# Altium PCB [1]BMS_AFE.PcbDoc (part 2 of 3)
Units mm, origin at the board's own origin, x right, y up, seen from the top; angles counter-clockwise.
Board outline 110 x 135 mm, 4 copper layers (Top Layer, Layer 1, Layer 2, Bottom Layer), stack 2.022 mm thick; 197 components, 113 nets, 551 pads, 368 vias.
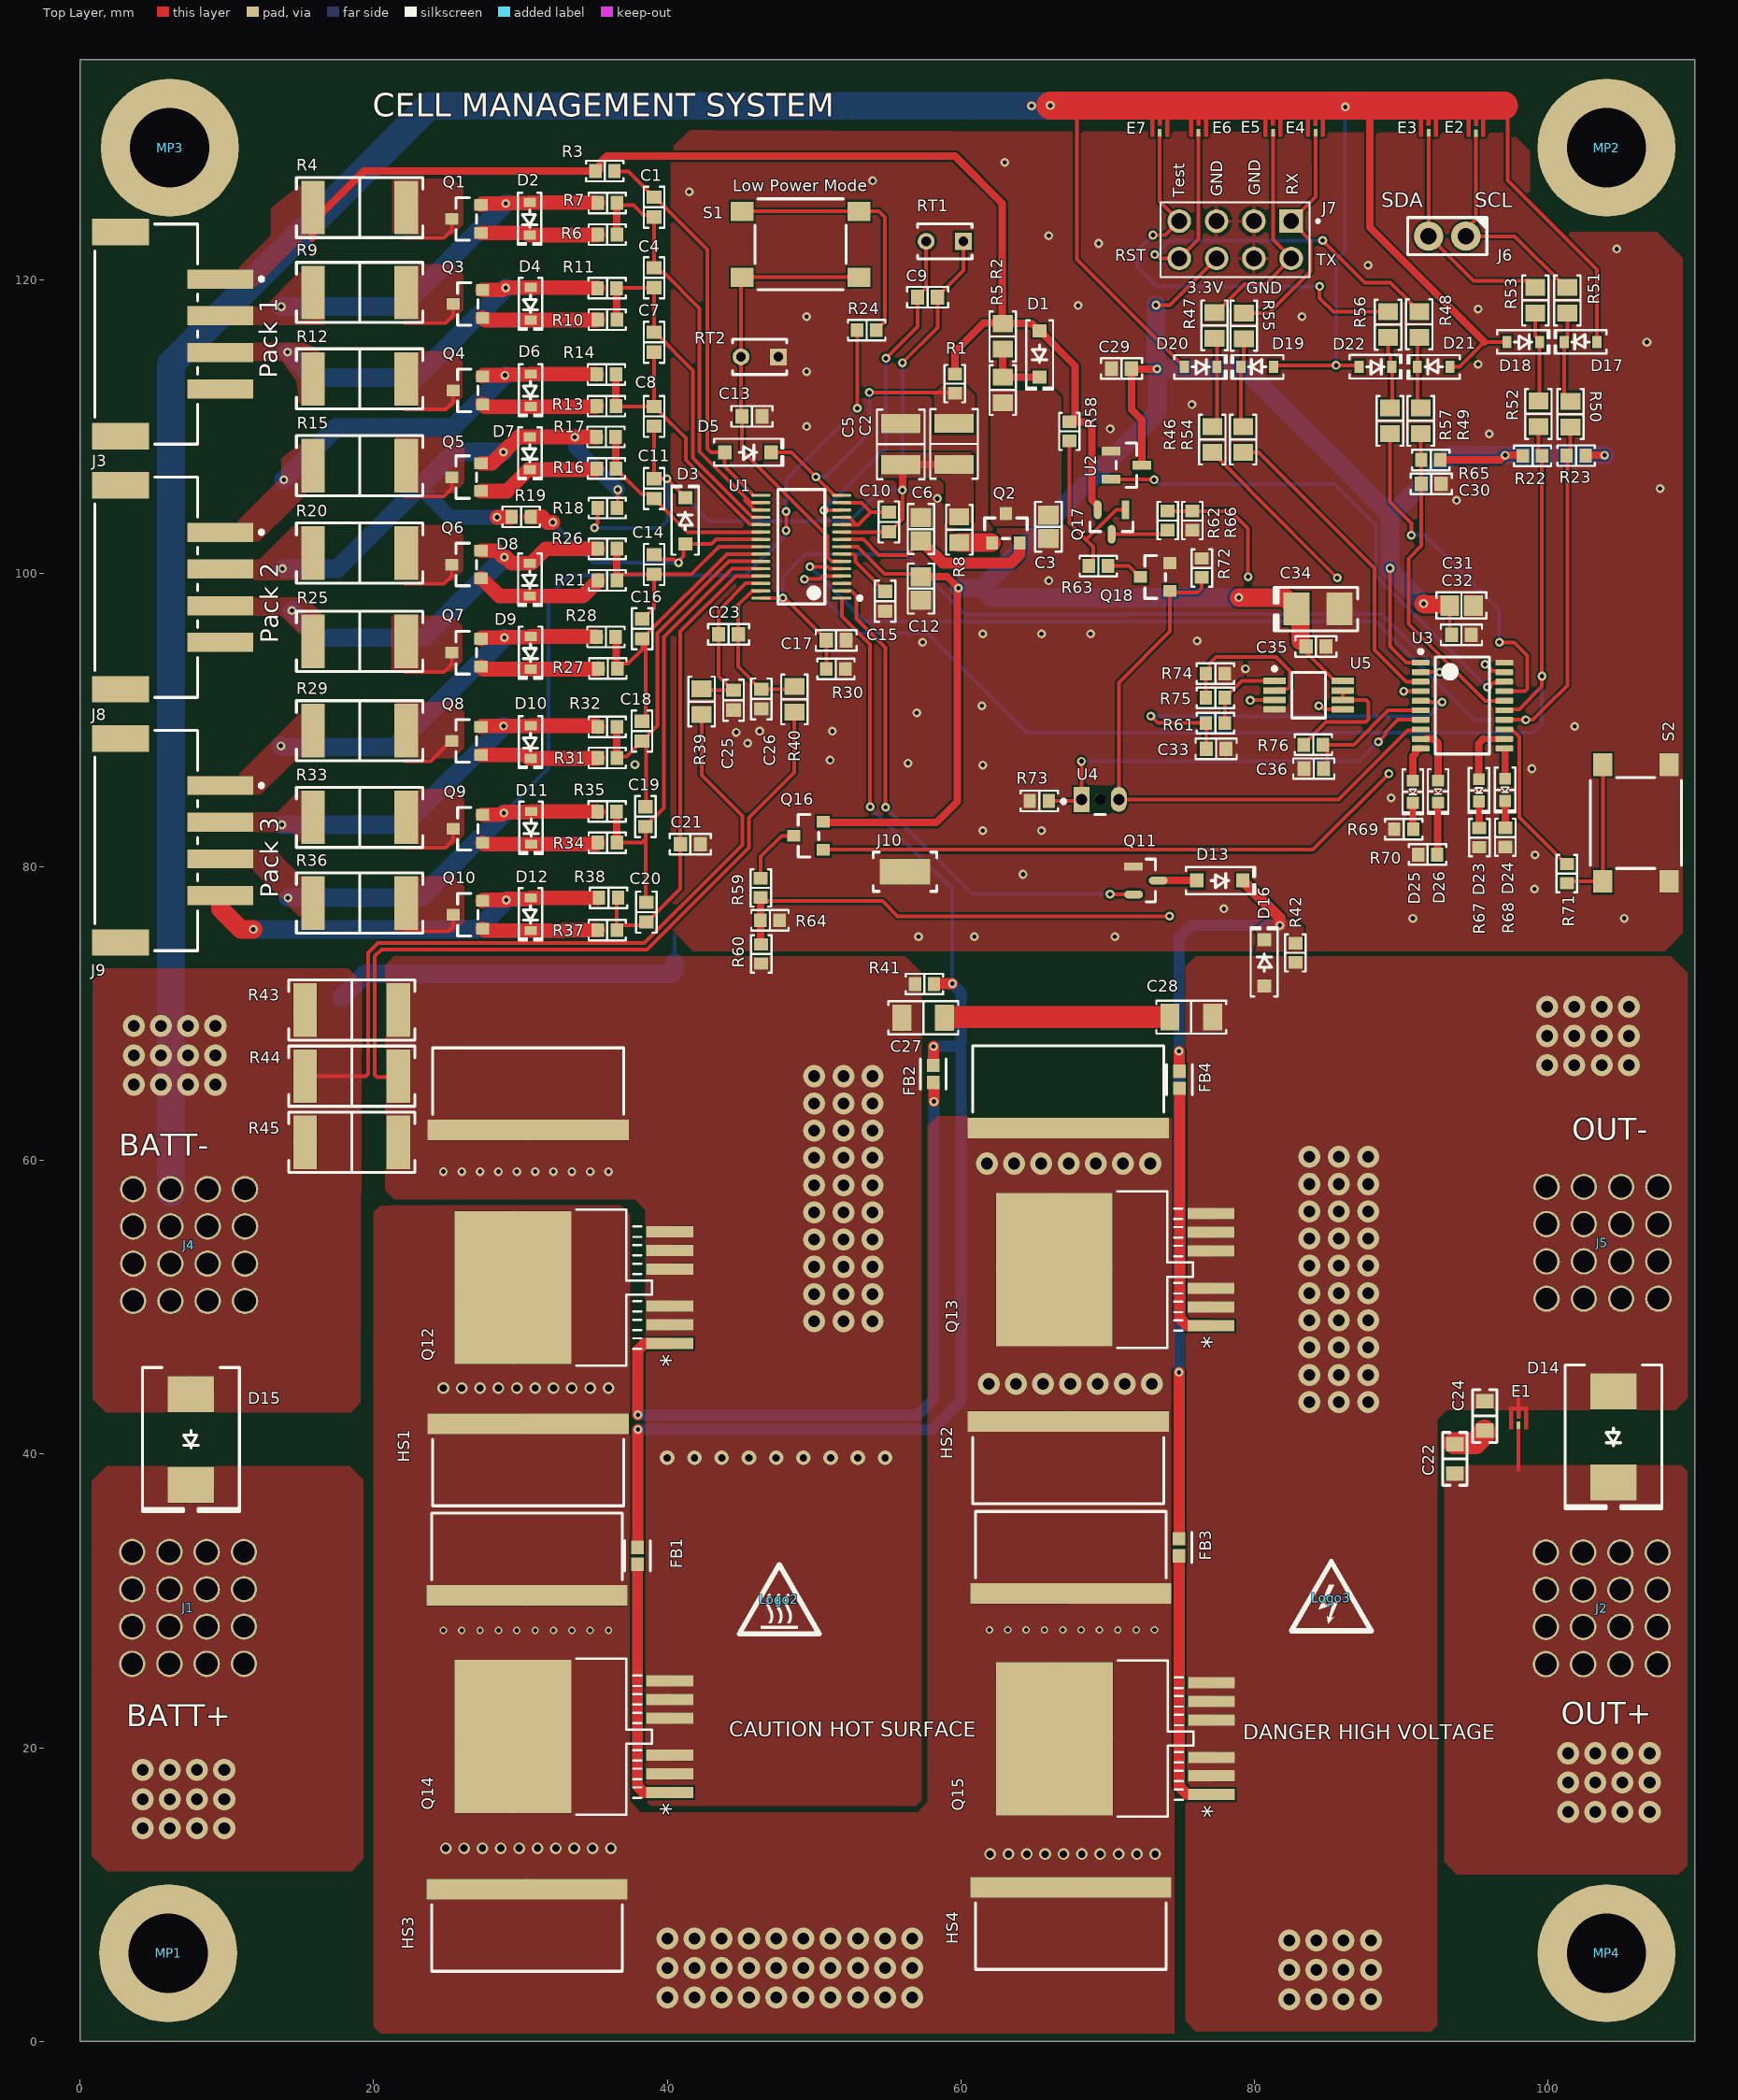
[diagram p0: Top Layer view]

## Part data (continued)
Q1 Q3 Q4 Q5 Q6 Q7 Q8 Q9 Q10: "MOSFET N-CH 12V 9.3A SC59", Current - Continuous Drain (Id) @ 25°C="9.3A (Ta)", Drain to Source Voltage (Vdss)="12 V", Drive Voltage (Max Rds On,  Min Rds On)="1.2V, 2.5V", Input Capacitance (Ciss) (Max) @ Vds="2426 pF @ 10 V", manufacturer="Diodes Incorporated", Operating Temperature="-55°C ~ 150°C (TJ)", Package / Case="TO-236-3, SC-59, SOT-23-3", Power Dissipation (Max)="680mW (Ta)", Supplier Device Package=SC-59-3, Supplier Part Number 1=DMN1019USN-7DICT-ND, componentlink1description=Datasheet, componentlink1url=https://www.diodes.com/assets/Datasheets/DMN1019USN.pdf, componentlink2description="DigiKey Link", componentlink2url=https://www.digikey.com/en/products/detail/diodes-incorporated/DMN1019USN-7/4898853, FET Type=N-Channel, Gate Charge (Qg) (Max) @ Vgs="50.6 nC @ 8 V", lastupdated="6/3/2024 8:15:16 PM", Lifecycle Status=Active, Minimum Order=1, Mounting Type="Surface Mount", packaging=TapeAndReel, Part Number=DMN1019USN-7, Part Status=Active, price=0.10, Rds On (Max) @ Id, Vgs="10mOhm @ 9.7A, 4.5V", series=-, Supplier 1=DigiKey, Technology="MOSFET (Metal Oxide)", Vgs (Max)=±8V, Vgs(th) (Max) @ Id="800mV @ 250µA"
Q2 Q18: "MOSFET N-CH 60V 260MA SOT-23", Current - Continuous Drain (Id) @ 25°C="260mA (Ta)", Drain to Source Voltage (Vdss)=60V, Drive Voltage (Max Rds On,  Min Rds On)="4.5V, 10V", Input Capacitance (Ciss) (Max) @ Vds="26.7pF @ 25V", manufacturer="ON Semiconductor", Operating Temperature="-55°C ~ 150°C (TJ)", Package / Case="TO-236-3, SC-59, SOT-23-3", Power Dissipation (Max)="300mW (Tj)", Supplier Device Package="SOT-23-3 (TO-236)", Supplier Part Number 1=2N7002ET1GOSCT-ND, componentlink1description=Datasheet, componentlink1url=http://www.onsemi.com/pub/Collateral/2N7002E-D.PDF, componentlink2description="DigiKey Link", componentlink2url=http://digikey.com/product-detail/en/on-semiconductor/2N7002ET1G/2N7002ET1GOSCT-ND/1967029, FET Type=N-Channel, Gate Charge (Qg) (Max) @ Vgs="0.81nC @ 5V", lastupdated="6/3/2024 8:15:26 PM", Lifecycle Status=Active, Minimum Order=1, Mounting Type="Surface Mount", packaging=TapeAndReel, Part Number=2N7002ET1G, Part Status=Active, price=0.03, Rds On (Max) @ Id, Vgs="2.5Ohm @ 240mA, 10V", series=-, Supplier 1=DigiKey, Technology="MOSFET (Metal Oxide)", Vgs (Max)=±20V, Vgs(th) (Max) @ Id="2.5V @ 250µA"
Q11 Q17: "MOSFET P-CH 60V 185MA SOT23-3", Case/Package=SOT-23-3, Continuous Drain Current (ID)=-185mA, Drain to Source Breakdown Voltage=-60V, Drain to Source Resistance=10R, Gate to Source Voltage (Vgs)=20V, Input Capacitance=155pF, Max Operating Temperature=150°C, Max Power Dissipation=350mW, Min Operating Temperature=-55°C, Package Quantity=1, Supplier Part Number 1=781-TP0610K-T1-GE3, Threshold Voltage=-2V, Drain to Source Voltage (Vdss)=-60V, Element Configuration=Single, Height=1.02mm, Lead Free="Lead Free", Length=3.04mm, Mount="Surface Mount", Nominal Vgs=-1V, Number of Channels=1, Number of Elements=1, Number of Pins=3, packaging="Tape and Reel", Polarity=P-CHANNEL, Power Dissipation=350mW, Radiation Hardening=No, Rds On Max=190mR, RoHS Compliant=Yes, series=TrenchFET®, Supplier 1=Mouser, Turn-Off Delay Time=35ns, Turn-On Delay Time=20ns, Weight=0.050717oz, Width=1.4mm
Q12 Q13 Q14 Q15: "No Description Available", Mfr_Name=STMicroelectronics, Supplier Part Number 1=511-STH315N10F7-6, RefDes=RefDes, Supplier 1=Mouser, Type=Type
Q16: "MOSFET P-CH 12V 2.6A SSOT3", Current - Continuous Drain (Id) @ 25°C="2.6A (Ta)", Drain to Source Voltage (Vdss)=12V, Drive Voltage (Max Rds On,  Min Rds On)="1.8V, 4.5V", Input Capacitance (Ciss) (Max) @ Vds="1138pF @ 6V", manufacturer="ON Semiconductor", Operating Temperature="-55°C ~ 150°C (TJ)", Package / Case="TO-236-3, SC-59, SOT-23-3", Power Dissipation (Max)="500mW (Ta)", Supplier Device Package=SuperSOT-3, Supplier Part Number 1=FDN306PCT-ND, componentlink1description=Datasheet, componentlink1url=https://www.onsemi.com/pub/Collateral/FDN306P-D.pdf, componentlink2description="DigiKey Link", componentlink2url=http://digikey.com/product-detail/en/on-semiconductor/FDN306P/FDN306PCT-ND/965600, FET Type=P-Channel, Gate Charge (Qg) (Max) @ Vgs="17nC @ 4.5V", lastupdated="6/3/2024 8:15:27 PM", Lifecycle Status=Active, Minimum Order=1, Mounting Type="Surface Mount", packaging=TapeAndReel, Part Number=FDN306P, Part Status=Active, price=0.13, Rds On (Max) @ Id, Vgs="40mOhm @ 2.6A, 4.5V", series=PowerTrench®, Supplier 1=DigiKey, Technology="MOSFET (Metal Oxide)", Vgs (Max)=±8V, Vgs(th) (Max) @ Id="1.5V @ 250µA"
R1 R3 R7 R11 R14 R17 R18 R19 R26 R28 R32 R35 R38 R67: library part CRCW06031K00FKEAC, "RES 1K OHM 1% 1/10W 0603", Device Package="0603 (1608 Metric)", manufacturer="Vishay Dale", Operating Temperature="-55°C ~ 155°C", Power (Watts)="0.1W, 1/10W", Supplier Device Package=0603, Supplier Part Number 1=541-3949-1-ND, Temperature Coefficient=±100ppm/°C, Tolerance=±1%, componentlink1description=Datasheet, componentlink1url=http://www.vishay.com/docs/28773/crcwce3.pdf, componentlink2description="DigiKey Link", componentlink2url=https://www.digikey.com/en/products/detail/vishay-dale/CRCW06031K00FKEAC/7928371, Composition="Thick Film", Height - Seated (Max)="0.022\" (0.55mm)", lastupdated="2/9/2024 8:43:06 PM", Lifecycle Status=Active, Minimum Order=1, Number of Terminations=2, Package / Case="0603 (1608 Metric)", packaging=CutTape, Part Number=CRCW06031K00FKEAC, Part Status=Active, partid=12551, price=0.01, Resistance="1 kOhms", series=CRCW-C, Supplier 1=DigiKey
R2 R8: library part CRCW0805100KFKEAC, "RES 100K OHM 1% 1/8W 0805", Device Package="0805 (2012 Metric)", manufacturer="Vishay Dale", Operating Temperature="-55°C ~ 155°C", Power (Watts)="0.125W, 1/8W", Supplier Device Package=0805, Supplier Part Number 1=541-3978-6-ND, Temperature Coefficient=±100ppm/°C, Tolerance=±1%, componentlink1description=Datasheet, componentlink1url=http://www.vishay.com/docs/28773/crcwce3.pdf, componentlink2description="DigiKey Link", componentlink2url=https://www.digikey.com/en/products/detail/vishay-dale/CRCW0805100KFKEAC/7928400, Composition="Thick Film", Height - Seated (Max)="0.024\" (0.60mm)", lastupdated="2/8/2024 9:01:19 PM", Lifecycle Status=Active, Minimum Order=1, Number of Terminations=2, Package / Case="0805 (2012 Metric)", packaging=ReReel, Part Number=CRCW0805100KFKEAC, Part Status=Active, partid=46227, price=0.01, Resistance="100 kOhms", series=CRCW-C, Size / Dimension="0.079\" L x 0.049\" W (2.00mm x 1.25mm)", Supplier 1=DigiKey
R4 R9 R12 R15 R20 R25 R29 R33 R36: library part CRCW251228R7FKEG, "RES SMD 28.7 OHM 1% 1W 2512", Device Package="2512 (6432 Metric)", manufacturer="Vishay Dale", Operating Temperature="-55°C ~ 155°C", Power (Watts)=1W, Ratings=AEC-Q200, Supplier Device Package=2512, Supplier Part Number 1=541-28.7AFCT-ND, Temperature Coefficient=±100ppm/°C, Tolerance=±1%, componentlink1description=Datasheet, componentlink1url=http://www.vishay.com/docs/20035/dcrcwe3.pdf, componentlink2description="DigiKey Link", componentlink2url=http://digikey.com/product-detail/en/vishay-dale/CRCW251228R7FKEG/541-28.7AFCT-ND/1178678, Composition="Thick Film", Features="Automotive AEC-Q200", Height - Seated (Max)="0.028\" (0.70mm)", lastupdated="9/2/2020 1:26:59 AM", Lifecycle Status=Active, Minimum Order=1, Number of Terminations=2, Package / Case="2512 (6432 Metric)", packaging=TapeAndReel, Part Number=CRCW251228R7FKEG, Part Status=Active, price=0.04, Resistance="28.7 Ohms", series=CRCW, Size / Dimension="0.248\" L x 0.124\" W (6.30mm x 3.15mm)", Supplier 1=DigiKey
R5 R39 R40 R46 R47 R48 R49 R50 R51 R52 R53 R54 R55 R56 R57: library part CRCW0805100RFKEA, "RES SMD 100 OHM 1% 1/8W 0805", Device Package="0805 (2012 Metric)", manufacturer="Vishay Dale", Operating Temperature="-55°C ~ 155°C", Power (Watts)="0.125W, 1/8W", Ratings=AEC-Q200, Supplier Device Package=0805, Supplier Part Number 1=541-100CCT-ND, Temperature Coefficient=±100ppm/°C, Tolerance=±1%, componentlink1description=Datasheet, componentlink1url=http://www.vishay.com/docs/20035/dcrcwe3.pdf, componentlink2description="DigiKey Link", componentlink2url=https://www.digikey.com/en/products/detail/vishay-dale/CRCW0805100RFKEA/1175523, Composition="Thick Film", Features="Automotive AEC-Q200", Height - Seated (Max)="0.020\" (0.50mm)", lastupdated="2/8/2024 9:02:37 PM", Lifecycle Status=Active, Minimum Order=1, Number of Terminations=2, Package / Case="0805 (2012 Metric)", packaging=TapeAndReel, Part Number=CRCW0805100RFKEA, Part Status=Active, partid=28106, price=0.01, Resistance="100 Ohms", series=CRCW, Size / Dimension="0.079\" L x 0.049\" W (2.00mm x 1.25mm)", Supplier 1=DigiKey
R6 R10 R13 R16 R21 R22 R23 R27 R31 R34 R37: library part CRCW060310K0JNEA, "RES SMD 10K OHM 5% 1/10W 0603", Device Package="0603 (1608 Metric)", manufacturer="Vishay Dale", Operating Temperature="-55°C ~ 155°C", Power (Watts)="0.1W, 1/10W", Ratings=AEC-Q200, Supplier Device Package=0603, Supplier Part Number 1=541-10KGCT-ND, Temperature Coefficient=±200ppm/°C, Tolerance=±5%, componentlink1description=Datasheet, componentlink1url=http://www.vishay.com/docs/20035/dcrcwe3.pdf, componentlink2description="DigiKey Link", componentlink2url=https://www.digikey.com/en/products/detail/vishay-dale/CRCW060310K0JNEA/1174253, Composition="Thick Film", Features="Automotive AEC-Q200", Height - Seated (Max)="0.020\" (0.50mm)", lastupdated="2/9/2024 8:43:35 PM", Lifecycle Status=Active, Minimum Order=1, Number of Terminations=2, Package / Case="0603 (1608 Metric)", packaging=CutTape, Part Number=CRCW060310K0JNEA, Part Status=Active, partid=5216, price=0.01, Resistance="10 kOhms", series=CRCW, Size / Dimension="0.063\" L x 0.033\" W (1.60mm x 0.85mm)", Supplier 1=DigiKey
R24 R71: library part CRCW06033K00JNEA, "RES SMD 3K OHM 5% 1/10W 0603", Device Package="0603 (1608 Metric)", manufacturer="Vishay Dale", Operating Temperature="-55°C ~ 155°C", Power (Watts)="0.1W, 1/10W", Ratings=AEC-Q200, Supplier Device Package=0603, Supplier Part Number 1=541-3.0KGCT-ND, Temperature Coefficient=±200ppm/°C, Tolerance=±5%, componentlink1description=Datasheet, componentlink1url=http://www.vishay.com/docs/20035/dcrcwe3.pdf, componentlink2description="DigiKey Link", componentlink2url=https://www.digikey.com/en/products/detail/vishay-dale/CRCW06033K00JNEA/1174240, Composition="Thick Film", Features="Automotive AEC-Q200", Height - Seated (Max)="0.020\" (0.50mm)", lastupdated="2/9/2024 8:42:33 PM", Lifecycle Status=Active, Minimum Order=1, Number of Terminations=2, Package / Case="0603 (1608 Metric)", packaging=TapeAndReel, Part Number=CRCW06033K00JNEA, Part Status=Active, partid=21261, price=0.01, Resistance="3 kOhms", series=CRCW, Size / Dimension="0.063\" L x 0.033\" W (1.60mm x 0.85mm)", Supplier 1=DigiKey
R30: library part CRCW0603499KFKEAHP, "RES SMD 499K OHM 1% 1/3W 0603", Device Package="0603 (1608 Metric)", manufacturer="Vishay Dale", Operating Temperature="-55°C ~ 155°C", Power (Watts)="0.333W, 1/3W", Ratings=AEC-Q200, Supplier Device Package=0603, Supplier Part Number 1=541-499KSCT-ND, Temperature Coefficient=±100ppm/°C, Tolerance=±1%, componentlink1description=Datasheet, componentlink1url=http://www.vishay.com/docs/20043/crcwhpe3.pdf, componentlink2description="DigiKey Link", componentlink2url=https://www.digikey.com/en/products/detail/vishay-dale/CRCW0603499KFKEAHP/2226474, Composition="Thick Film", Features="Automotive AEC-Q200, Pulse Withstanding", Height - Seated (Max)="0.022\" (0.55mm)", lastupdated="2/9/2024 8:42:58 PM", Lifecycle Status=Active, Minimum Order=1, Number of Terminations=2, Package / Case="0603 (1608 Metric)", packaging=TapeAndReel, Part Number=CRCW0603499KFKEAHP, Part Status=Active, partid=14787, price=0.02, Resistance="499 kOhms", series=CRCW-HP, Size / Dimension="0.063\" L x 0.033\" W (1.60mm x 0.85mm)", Supplier 1=DigiKey
R41 R42: library part RMCF0603JT1M00, "RES 1M OHM 5% 1/10W 0603", Device Package="0603 (1608 Metric)", manufacturer="Stackpole Electronics Inc", Operating Temperature="-55°C ~ 155°C", Power (Watts)="0.1W, 1/10W", Ratings=AEC-Q200, Supplier Device Package=0603, Supplier Part Number 1=RMCF0603JT1M00CT-ND, Temperature Coefficient=±200ppm/°C, Tolerance=±5%, componentlink1description=Datasheet, componentlink1url=https://www.seielect.com/catalog/sei-rmcf_rmcp.pdf, componentlink2description="DigiKey Link", componentlink2url=https://www.digikey.com/en/products/detail/stackpole-electronics-inc/RMCF0603JT1M00/1758066, Composition="Thick Film", Features="Automotive AEC-Q200", Height - Seated (Max)="0.022\" (0.55mm)", lastupdated="2/9/2024 8:43:33 PM", Lifecycle Status=Active, Minimum Order=1, Number of Terminations=2, Package / Case="0603 (1608 Metric)", packaging=CutTape, Part Number=RMCF0603JT1M00, Part Status=Active, partid=5847, price=0.01, Resistance="1 MOhms", series=RMCF, Size / Dimension="0.061\" L x 0.031\" W (1.55mm x 0.80mm)", Supplier 1=DigiKey
R43 R44 R45: library part WSLF25121L000FEA, "RES 0.001 OHM 1% 5W 2512", Device Package="2512 (6432 Metric)", manufacturer="Vishay Dale", Operating Temperature="-65°C ~ 170°C", Power (Watts)=5W, Ratings=AEC-Q200, Supplier Device Package=2512, Supplier Part Number 1=541-3125-1-ND, Temperature Coefficient=±170ppm/°C, Tolerance=±1%, componentlink1description=Datasheet, componentlink1url=http://www.vishay.com/docs/30193/wslf.pdf, componentlink2description="DigiKey Link", componentlink2url=http://digikey.com/product-detail/en/vishay-dale/WSLF25121L000FEA/541-3125-1-ND/6194698, Composition="Metal Element", Features="Automotive AEC-Q200, Current Sense, Moisture Resistant, Pulse Withstanding", Height - Seated (Max)="0.034\" (0.86mm)", lastupdated="5/23/2022 1:49:31 PM", Lifecycle Status=Active, Minimum Order=1, Number of Terminations=2, Package / Case="2512 (6432 Metric)", packaging=TapeAndReel, Part Number=WSLF25121L000FEA, Part Status=Active, price=0.22, Resistance="1 mOhms", series=WSLF, Size / Dimension="0.250\" L x 0.119\" W (6.35mm x 3.02mm)", Supplier 1=DigiKey
R58 R72: library part CRCW0603100KJNEA, "RES SMD 100K OHM 5% 1/10W 0603", Device Package="0603 (1608 Metric)", manufacturer="Vishay Dale", Operating Temperature="-55°C ~ 155°C", Power (Watts)="0.1W, 1/10W", Ratings=AEC-Q200, Supplier Device Package=0603, Supplier Part Number 1=541-100KGCT-ND, Temperature Coefficient=±200ppm/°C, Tolerance=±5%, componentlink1description=Datasheet, componentlink1url=http://www.vishay.com/docs/20035/dcrcwe3.pdf, componentlink2description="DigiKey Link", componentlink2url=https://www.digikey.com/en/products/detail/vishay-dale/CRCW0603100KJNEA/1174277, Composition="Thick Film", Features="Automotive AEC-Q200", Height - Seated (Max)="0.020\" (0.50mm)", lastupdated="2/9/2024 8:42:33 PM", Lifecycle Status=Active, Minimum Order=1, Number of Terminations=2, Package / Case="0603 (1608 Metric)", packaging=TapeAndReel, Part Number=CRCW0603100KJNEA, Part Status=Active, partid=21189, price=0.01, Resistance="100 kOhms", series=CRCW, Size / Dimension="0.063\" L x 0.033\" W (1.60mm x 0.85mm)", Supplier 1=DigiKey
R59: library part CRCW0603154KFKEAHP, "RES SMD 154K OHM 1% 1/3W 0603", Device Package="0603 (1608 Metric)", manufacturer="Vishay Dale", Operating Temperature="-55°C ~ 155°C", Power (Watts)="0.333W, 1/3W", Ratings=AEC-Q200, Supplier Device Package=0603, Supplier Part Number 1=541-CRCW0603154KFKEAHPCT-ND, Temperature Coefficient=±100ppm/°C, Tolerance=±1%, componentlink1description=Datasheet, componentlink1url=https://www.vishay.com/docs/20043/crcwhpe3.pdf, componentlink2description="DigiKey Link", componentlink2url=https://www.digikey.com/en/products/detail/vishay-dale/CRCW0603154KFKEAHP/2226414, Composition="Thick Film", Features="Automotive AEC-Q200, Pulse Withstanding", Height - Seated (Max)="0.022\" (0.55mm)", lastupdated="2/9/2024 8:40:40 PM", Lifecycle Status=Active, Minimum Order=1, Number of Terminations=2, Package / Case="0603 (1608 Metric)", packaging=TapeAndReel, Part Number=CRCW0603154KFKEAHP, Part Status=Active, partid=78501, price=0.02, Resistance="154 kOhms", series=CRCW-HP, Size / Dimension="0.063\" L x 0.033\" W (1.60mm x 0.85mm)", Supplier 1=DigiKey
R60 R68 R69 R70: library part CRCW06031K00JNEA, "RES SMD 1K OHM 5% 1/10W 0603", Device Package="0603 (1608 Metric)", manufacturer="Vishay Dale", Operating Temperature="-55°C ~ 155°C", Power (Watts)="0.1W, 1/10W", Ratings=AEC-Q200, Supplier Device Package=0603, Supplier Part Number 1=541-1.0KGCT-ND, Temperature Coefficient=±200ppm/°C, Tolerance=±5%, componentlink1description=Datasheet, componentlink1url=http://www.vishay.com/docs/20035/dcrcwe3.pdf, componentlink2description="DigiKey Link", componentlink2url=https://www.digikey.com/en/products/detail/vishay-dale/CRCW06031K00JNEA/1174229, Composition="Thick Film", Features="Automotive AEC-Q200", Height - Seated (Max)="0.020\" (0.50mm)", lastupdated="2/9/2024 8:42:33 PM", Lifecycle Status=Active, Minimum Order=1, Number of Terminations=2, Package / Case="0603 (1608 Metric)", packaging=TapeAndReel, Part Number=CRCW06031K00JNEA, Part Status=Active, partid=21209, price=0.01, Resistance="1 kOhms", series=CRCW, Size / Dimension="0.063\" L x 0.033\" W (1.60mm x 0.85mm)", Supplier 1=DigiKey
R61 R74 R76: library part CRCW06031K30FKEAC, "RES 1.3K OHM 1% 1/10W 0603", Device Package="0603 (1608 Metric)", manufacturer="Vishay Dale", Operating Temperature="-55°C ~ 155°C", Power (Watts)="0.1W, 1/10W", Supplier Device Package=0603, Supplier Part Number 1=541-5229-1-ND, Temperature Coefficient=±100ppm/°C, Tolerance=±1%, componentlink1description=Datasheet, componentlink1url=https://www.vishay.com/docs/28773/crcwce3.pdf, componentlink2description="DigiKey Link", componentlink2url=https://www.digikey.com/en/products/detail/vishay-dale/CRCW06031K30FKEAC/7924107, Composition="Thick Film", Height - Seated (Max)="0.022\" (0.55mm)", lastupdated="2/9/2024 8:41:17 PM", Lifecycle Status=Active, Minimum Order=1, Number of Terminations=2, Package / Case="0603 (1608 Metric)", packaging=TapeAndReel, Part Number=CRCW06031K30FKEAC, Part Status=Active, partid=65830, price=0.01, Resistance="1.3 kOhms", series=CRCW-C, Size / Dimension="0.063\" L x 0.031\" W (1.60mm x 0.80mm)", Supplier 1=DigiKey
R62: library part CRCW0603110KFKEB, "RES SMD 110K OHM 1% 1/10W 0603", Device Package="0603 (1608 Metric)", manufacturer="Vishay Dale", Operating Temperature="-55°C ~ 155°C", Power (Watts)="0.1W, 1/10W", Ratings=AEC-Q200, Supplier Device Package=0603, Supplier Part Number 1=541-CRCW0603110KFKEBCT-ND, Temperature Coefficient=±100ppm/°C, Tolerance=±1%, componentlink1description=Datasheet, componentlink1url=http://www.vishay.com/docs/20035/dcrcwe3.pdf, componentlink2description="DigiKey Link", componentlink2url=https://www.digikey.com/en/products/detail/vishay-dale/CRCW0603110KFKEB/5070720, Composition="Thick Film", Features="Automotive AEC-Q200", Height - Seated (Max)="0.020\" (0.50mm)", lastupdated="2/9/2024 8:41:46 PM", Lifecycle Status=Active, Minimum Order=1, Number of Terminations=2, Package / Case="0603 (1608 Metric)", packaging=TapeAndReel, Part Number=CRCW0603110KFKEB, Part Status=Active, partid=56611, price=0.01, Resistance="110 kOhms", series=CRCW, Size / Dimension="0.063\" L x 0.033\" W (1.60mm x 0.85mm)", Supplier 1=DigiKey
R63: library part CRCW0603360KFKEAC, "RES 360K OHM 1% 1/10W 0603", Device Package="0603 (1608 Metric)", manufacturer="Vishay Dale", Operating Temperature="-55°C ~ 155°C", Power (Watts)="0.1W, 1/10W", Supplier Device Package=0603, Supplier Part Number 1=541-5366-1-ND, Temperature Coefficient=±100ppm/°C, Tolerance=±1%, componentlink1description=Datasheet, componentlink1url=https://www.vishay.com/docs/28773/crcwce3.pdf, componentlink2description="DigiKey Link", componentlink2url=https://www.digikey.com/en/products/detail/vishay-dale/CRCW0603360KFKEAC/7924506, Composition="Thick Film", Height - Seated (Max)="0.022\" (0.55mm)", lastupdated="2/9/2024 8:41:05 PM", Lifecycle Status=Active, Minimum Order=1, Number of Terminations=2, Package / Case="0603 (1608 Metric)", packaging=TapeAndReel, Part Number=CRCW0603360KFKEAC, Part Status=Active, partid=69335, price=0.01, Resistance="360 kOhms", series=CRCW-C, Size / Dimension="0.063\" L x 0.031\" W (1.60mm x 0.80mm)", Supplier 1=DigiKey
R64 R65 R66 R73: library part CRCW060310K0FKEAC, "RES 10K OHM 1% 1/10W 0603", Device Package="0603 (1608 Metric)", manufacturer="Vishay Dale", Operating Temperature="-55°C ~ 155°C", Power (Watts)="0.1W, 1/10W", Supplier Device Package=0603, Supplier Part Number 1=541-5136-1-ND, Temperature Coefficient=±100ppm/°C, Tolerance=±1%, componentlink1description=Datasheet, componentlink1url=http://www.vishay.com/docs/28773/crcwce3.pdf, componentlink2description="DigiKey Link", componentlink2url=https://www.digikey.com/en/products/detail/vishay-dale/CRCW060310K0FKEAC/7924693, Composition="Thick Film", Height - Seated (Max)="0.022\" (0.55mm)", lastupdated="2/9/2024 8:41:46 PM", Lifecycle Status=Active, Minimum Order=1, Number of Terminations=2, Package / Case="0603 (1608 Metric)", packaging=CutTape, Part Number=CRCW060310K0FKEAC, Part Status=Active, partid=56547, price=0.01, Resistance="10 kOhms", series=CRCW-C, Size / Dimension="0.063\" L x 0.031\" W (1.60mm x 0.80mm)", Supplier 1=DigiKey
R75: library part CRCW060331K6FKEAC, "RES 31.6K OHM 1% 1/10W 0603", Device Package="0603 (1608 Metric)", manufacturer="Vishay Dale", Operating Temperature="-55°C ~ 155°C", Power (Watts)="0.1W, 1/10W", Supplier Device Package=0603, Supplier Part Number 1=541-5351-1-ND, Temperature Coefficient=±100ppm/°C, Tolerance=±1%, componentlink1description=Datasheet, componentlink1url=https://www.vishay.com/docs/28773/crcwce3.pdf, componentlink2description="DigiKey Link", componentlink2url=https://www.digikey.com/en/products/detail/vishay-dale/CRCW060331K6FKEAC/7924046, Composition="Thick Film", Height - Seated (Max)="0.022\" (0.55mm)", lastupdated="2/9/2024 8:41:17 PM", Lifecycle Status=Active, Minimum Order=1, Number of Terminations=2, Package / Case="0603 (1608 Metric)", packaging=TapeAndReel, Part Number=CRCW060331K6FKEAC, Part Status=Active, partid=65802, price=0.01, Resistance="31.6 kOhms", series=CRCW-C, Size / Dimension="0.063\" L x 0.031\" W (1.60mm x 0.80mm)", Supplier 1=DigiKey
RT1 RT2: "Thermistor NTC 10KOhm 1% 2-Pin", Max Operating Temperature=110°C, Min Operating Temperature=-50°C, Resistance=10kΩ, Supplier Part Number 1=954-103AT-2, Tolerance=1%, Height=2.4mm, Lead Pitch=2.54mm, Length=17mm, Number of Pins=2, packaging=Bulk, RoHS Compliant=Yes, series=AT, Supplier 1=Mouser, Termination=Radial, Width=3.7mm
S1: library part 430182070816, "Switch Tactile Spst-no 0.05A 12V", Color=Black, Contact Current Rating=50mA, Contact Resistance=100mΩ, Insulation Resistance=100MΩ, Max Operating Temperature=85°C, Min Operating Temperature=-40°C, Supplier Part Number 1=710-430182070816, Voltage Rating=12V, Actuator Length=3.6mm, Actuator Material="Liquid Crystal Polymer, Polymer", Contact Material="Stainless Steel, Steel", Contact Plating=Silver, Current Rating=50mA, Diameter=3mm, Height=7mm, Illumination Type="Illuminated, Non-Illuminated", Lead Free="Lead Free", Length=6.2mm, Life (Cycles)=1Mcycles, Mechanical Life=1Mcycles, Mount="Surface Mount", packaging="Tape and Reel", REACH SVHC="No SVHC", RoHS=Compliant, Supplier 1=Mouser, Switch Function=Off-Mom, Switch Travel=250µm, Termination="Gull Wing", Throw Configuration=SPST, Voltage Rating (DC)=12V, Width=6.2mm
S2: "Switch Tactile Spst-no 0.05A 12V", Color=Black, Contact Current Rating=50mA, Contact Resistance=100mΩ, Insulation Resistance=100MΩ, Max Operating Temperature=85°C, Min Operating Temperature=-40°C, Supplier Part Number 1=710-430182070816, Voltage Rating=12V, Actuator Length=3.6mm, Actuator Material="Liquid Crystal Polymer, Polymer", Contact Material="Stainless Steel, Steel", Contact Plating=Silver, Current Rating=50mA, Diameter=3mm, Height=7mm, Illumination Type="Illuminated, Non-Illuminated", Lead Free="Lead Free", Length=6.2mm, Life (Cycles)=1Mcycles, Mechanical Life=1Mcycles, Mount="Surface Mount", packaging="Tape and Reel", REACH SVHC="No SVHC", RoHS=Compliant, Supplier 1=Mouser, Switch Function=Off-Mom, Switch Travel=250µm, Termination="Gull Wing", Throw Configuration=SPST, Voltage Rating (DC)=12V, Width=6.2mm
U1: "IC BATT MGMT LI-ION AFE 30TSSOP", manufacturer="Texas Instruments", Max Supply Voltage=25V, Min Supply Voltage=6V, Nominal Supply Current=40-130uA, Package=DBT0030A, Supplier Part Number 1=595-BQ7693003DBTR, Temperature="-40°C to +85°C", Temperature Range High=+85°C, Temperature Range Low=-40°C, Automotive=No, Category=IC, componentlink2description=Datasheet, componentlink2url=http://www.ti.com/lit/ds/symlink/bq76930.pdf, Device Class L1="Integrated Circuits (ICs)", Device Class L2="Power Management ICs", Device Class L3="Battery Management", Digikey Description="IC BATT MGMT LI-ION AFE 30TSSOP", Height=1.2mm, Ipc Land Pattern Name=SOP50P635X120-30, Lead Free=Yes, Manufacturer Part Number=BQ7693003DBTR, Mouser Description="6 to 10-Series Cell Li-Ion and Li-Phosphate Battery Monitor (bq76940 Family) 30-TSSOP -40 to 85", Number Of Cells=10, Number Of Outputs=2, Octopart=https://octopart.com/bq7693003dbtr-texas+instruments-34472212, RoHS=TRUE, Standoff Height=0.05mm, Supplier 1=Mouser, Supplier 2=Digikey, Supplier Part Number 2=296-39961-1-ND
U2: "IC SUPERVISOR 1 CHANNEL SOT23-3", Case/Package=SOT-23, Max Operating Temperature=85°C, Max Reset Threshold Voltage=3.126V, Max Supply Current=500nA, Max Supply Voltage=6.5V, Min Operating Temperature=-40°C, Min Reset Threshold Voltage=3.003V, Min Supply Voltage=600mV, Number of Voltages Monitored=1, Package Quantity=3000, Quiescent Current=150nA, Supplier Part Number 1=595-TPS3839G33DBZR, Threshold Voltage=3.08V, Lead Free="Lead Free", Mount="Surface Mount", Number of Pins=3, Output=TOTEM-POLE, packaging="Tape and Reel", Radiation Hardening=No, Reset="Active Low", Reset Timeout=120ms, RoHS Compliant=Yes, series=TPS3839G33, Supplier 1=Mouser, Type="Simple Reset/Power-On Reset", Watchdog Timer=No
U3: "16 MHz Mixed Signal Microcontroller with 16 KB Flash, 512 B SRAM and 24 GPIOs, -40 to 85 degC, 20-pin SOP (PW), Green (RoHS & no Sb/Br)", Frequency(MHz)=16, manufacturer="Texas Instruments", Supplier Part Number 1=595-MSP430G2553IPW20, Temp Sensor=Yes, ADC="10-bit SAR", ADC Channels=8, Brown Out Reset=Yes, Cap touch I/O=Yes, Code_JEDEC=MO-153, Comparators=Yes, componentlink1description="Manufacturer URL", componentlink1url=http://www.ti.com/, componentlink2description=Datasheet, componentlink2url=http://www.ti.com/general/docs/lit/getliterature.tsp?genericPartNumber=MSP430G2553&fileType=pdf, ComponentLink3Description="Package Specification", ComponentLink3URL=http://www.ti.com.cn/cn/lit/ml/mpds362/mpds362.pdf, DatasheetVersion=SLAS735G, Eco-Plan="Green (RoHS & no Sb/Br)", Flash(KB)=16, GPIO=24, Mounting Technology="Surface Mount", PackageDescription="20-Pin Plastic Small Outline, Body 6.5 x 4.4 mm, 0.65 mm Pitch", PackageReference=PW0020A, PackageVersion=4040064-5/G, PartNumber=MSP430G2553IPW20, SRAM(B)=512, SubFamily="Value Line", Supplier 1=Mouser, Timers - 16-bit=2, USCI_A (UART/LIN/IrDA/SPI)=1, USCI_B (I2C & SPI)=1, Watchdog=Yes
U4: "SENSOR DIGITAL -50C-150C TO92-2", Ambient Temperature Range High=+150°C, Ambient Temperature Range Low=-50°C, manufacturer="Texas Instruments", Max Supply Voltage=5.5V, Min Supply Voltage=2V, Operating Supply Current=39uA, Package=LPG0002A, Supplier Part Number 1=595-LMT01LPG, Temperature="-50°C to +150°C", Automotive=No, Category=IC, componentlink2description=Datasheet, componentlink2url=https://www.ti.com/lit/ds/symlink/lmt01.pdf, Device Class L1=Sensors, Device Class L2="Temperature and Humidity Sensors", Device Class L3=unset, Digikey Description="SENSOR DIGITAL -50C-150C TO92-2", Height=5.05mm, Lead Free=Yes, Manufacturer Part Number=LMT01LPG, Mouser Description="0.5°C Accurate 2-pin Temperature Sensor with a Pulse Train Interface 2-TO-92 -50 to 150", Octopart=https://octopart.com/lmt01lpg-texas+instruments-60770464, Resolution=13bits, RoHS=TRUE, Sensor Output="Analog Voltage,Other", Supplier 1=Mouser, Temperature Range High=+150°C, Temperature Range Low=-50°C
U5: "Dual Rail-to-Rail Input/Output, 30V, Wide Voltage Range, High Output Operational Amplifier, 8-pin Mini SOIC, Pb-Free", manufacturer="Texas Instruments", Package Reference=DGK0008A, PackageTopMarking=ZXTT*AA5A, PowerWise=N, Supplier Part Number 1=296-LM7332MME/NOPBCT-ND, Code_JEDEC=MO-187-AA, componentlink1description="Datasheet URL", componentlink1url=http://www.ti.com/general/docs/lit/getliterature.tsp?genericPartNumber=LM7332&fileType=pdf, CompType=Amplifiers, PackageDescription="MINI SOIC, .118 x .118 x .034in, 8 Lead, .0256in Pitch", PinCount=8, RoHS=Y, Supplier 1=Digikey

## Via types
v1: diameter 1.5, hole 0.8, Top Layer to Bottom Layer, 164 vias
v2: diameter 0.61, hole 0.305, Top Layer to Bottom Layer, 135 vias
v3: diameter 0.8, hole 0.5, Top Layer to Bottom Layer, 30 vias
v4: diameter 0.5, hole 0.3, Top Layer to Bottom Layer, 20 vias
v5: diameter 0.6, hole 0.3, Top Layer to Bottom Layer, 10 vias
v6: diameter 1, hole 0.5, Top Layer to Bottom Layer, 9 vias

## Nets (pads, with @x,y where several pads share a name; then routed paths per layer and width w, separated by ;. In a path a pad name is that pad's centre, name@x,y a point inside that pad or via, vN(x,y) a via of type N, cw(c..) or ccw(c..) an arc to the next point about the centre after c; other vN are vias at no path point)
ALERT: C17.2 R30.2 U1.30 U3.2 | length 59.1
  Top Layer w0.254: U1.30@46.39,98.318 46.393,98.322 47.872,98.322 v2(47.875,98.325) 47.971,98.325 48.114,98.182 48.151,98.182 50.84,95.493 C17.2@50.84,95.443 R30.2@50.84,93.493 ; U3.2@91.333,93.274 v2(92.633,93.274)
  Bottom Layer w0.254: v2(47.875,98.325) 47.875,99.792 49.376,101.293 56.193,101.293 60.298,97.187 71.56,97.187 71.605,97.232 88.675,97.232 v2(92.633,93.274)
BATT+: C22.2 D14.2 D15.2 E1.2 J1.1 J2.1 | length 3
  Top Layer w0.254: 98,38.925 E1.2@98,41.967
  other v1: 4.25,14.5 6.106,14.5 7.961,14.5 9.817,14.5 101.373,15.623 103.229,15.623 105.084,15.623 106.94,15.623 4.25,16.5 6.106,16.5 7.961,16.5 9.817,16.5 101.373,17.623 103.229,17.623 105.084,17.623 106.94,17.623 4.25,18.5 6.106,18.5 7.961,18.5 9.817,18.5 101.373,19.623 103.229,19.623 105.084,19.623 106.94,19.623
BATT-: D15.1 D17.1 D18.1 D19.1 D20.1 D21.1 D22.1 E2.1 E3.1 E4.1 E5.1 E6.1 E7.1 J4.1 NT1.2 R39.1 R43.1 R44.1 R45.1 | length 324.9
  Top Layer w0.254: R44.1@15.375,65.749 19.472,65.749 19.621,65.898 19.621,74.162 20.296,74.836 38.449,74.836 45.121,81.508 45.121,83.479 42.34,86.26 R39.1@42.34,90.393 ; 67.875,131.875 67.9,131.85 67.9,121.396 74.939,114.356 75.042,114.356 75.227,114.171 D20.1@75.227,114.068 ; 73.275,131.85 73.55,131.575 73.55,130.725 ; 75.85,131.875 75.95,131.875 76.2,131.625 76.2,130.75 ; 80.875,131.875 81.275,131.475 81.275,130.75 ; D19.1@81.315,114.068 81.421,114.175 v2(85.575,114.175) 87.044,114.175 D22.1@87.143,114.076 ; 84.15,131.25 84.675,131.775 v2(86.2,131.775) ; 91.701,131.875 91.875,131.701 91.875,131.125 ; D21.1@93.332,114.067 93.977,114.067 95.68,115.77 D18.1@97.216,115.77 ; 94.7,131.8 95.1,131.4 95.1,130.825 ; 97.101,131.8 97.25,131.651 97.25,126.775 103.341,120.684 D17.1@103.341,115.77
  Top Layer w0.508: 87.875,131.8 87.875,123.575 95.68,115.77
  Top Layer w1.905: v2(66.1,131.875) 67.875,131.875 75.85,131.875 ; 75.95,131.875 80.875,131.875 84.175,131.875 91.701,131.875 91.875,131.875 97.026,131.875
  Bottom Layer w0.254: v2(85.575,114.175) 85.575,121.325 86.2,121.95 v2(86.2,131.775)
  Bottom Layer w1.27: 17.813,71.088 19.432,72.707 40.267,72.707 40.5,72.939 40.5,73.5
  Bottom Layer w1.905: J4.1@6.19,57.81 6.19,114.28 23.76,131.85 v2(64.825,131.85) v2@66.1,131.85
  other v1: 3.648,65.177 5.504,65.177 7.359,65.177 9.215,65.177 3.648,67.177 5.504,67.177 7.359,67.177 9.215,67.177 3.648,69.177 5.504,69.177 7.359,69.177 9.215,69.177
C1: D11.1 J9.3 Q9.2 R24.2 R35.2 R36.1 | length 75
  Top Layer w0.254: v2(48.1,102.925) v2(48.1,104.213) ; R24.2@52.94,116.568 52.94,111.26 v2(52.95,111.25)
  Top Layer w1: Q9.2@27.415,83.558 28.661,83.558 28.779,83.675 v2(28.875,83.675) 28.929,83.729 30.669,83.729 D11.1@30.723,83.784 35.23,83.784 R35.2@35.265,83.749
  Bottom Layer w0.254: v2(28.875,83.675) 31.925,86.725 31.925,98.436 33.349,99.861 45.318,99.861 48.032,102.575 48.032,102.857 v2(48.1,102.925) ; v2(48.1,104.213) 48.1,106.4 v2(52.95,111.25)
  Bottom Layer w1.27: v2(14.15,77.9) 23.164,77.9 v2@28.907,83.643